# EAGLE board Trafo_schematics (EAGLE 9.6.2)
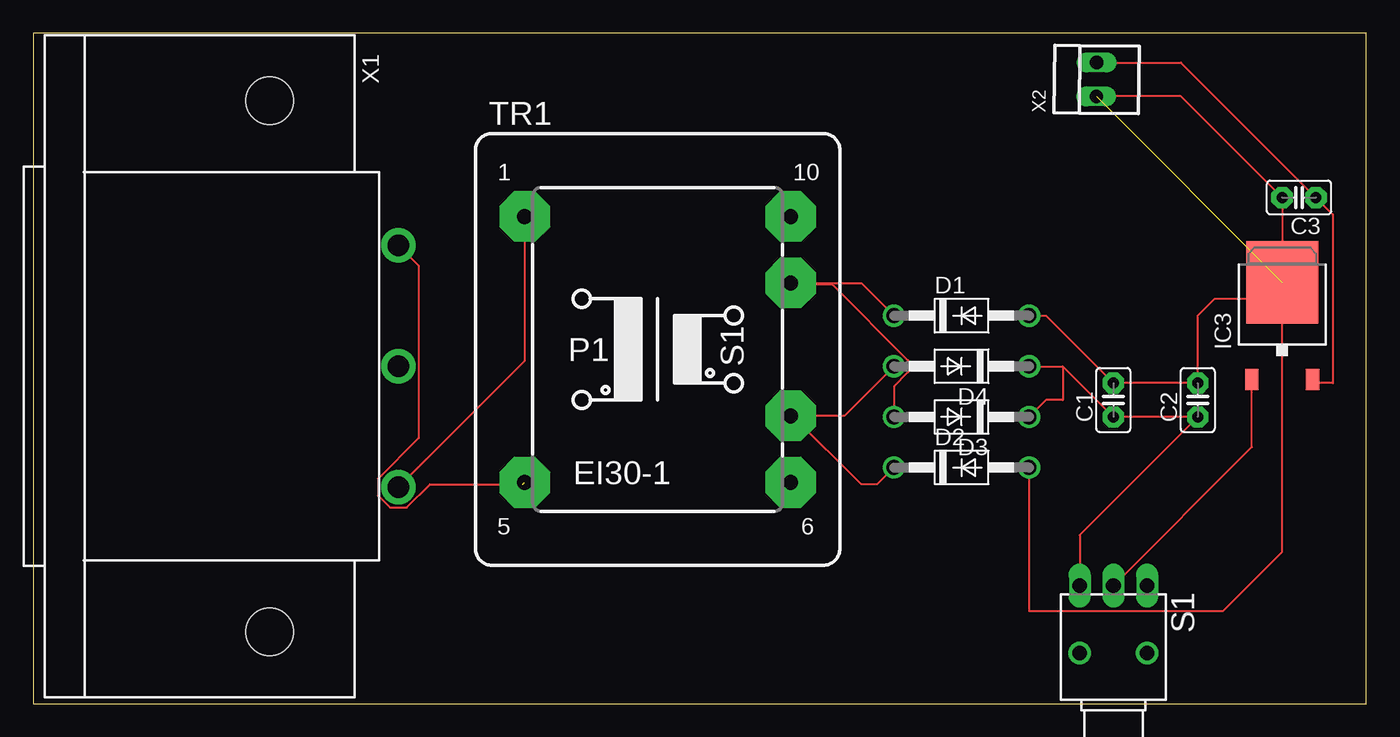
[diagram p0: board, top side]

Size 100.31 x 50.47 mm. Coordinates in mm from the lower left corner, seen from the top.
Outline: 0,0 100.31,0 100.31,50.47 0,50.47 0,0
Copper layers (1*16): Top 0.035mm / dielectric 1.5mm / Bottom 0.035mm
Design rules "default": minimum track width 6mil, minimum drill 0.35mm, track to track 6mil, track to pad 6mil, pad to pad 6mil, via to via 6mil, smd to smd 6mil, copper to edge 40mil, drill to drill 6mil, minimum pad ring 10mil, minimum via ring 8mil, stop-mask expansion 4mil, vias tented up to drill 0mil, thermal gap 10mil

## Footprints (pad centres in the part's own frame; a part is rotated, then mirrored left to right if it is on the bottom)
C2.5-2 = drill 0.813 pad 1.6 octagon: 1 -1.27,0; 2 1.27,0
DO41-10 = drill 1.118: A 5.08,0; C -5.08,0
TO252 = smd 1 x 1.6: 1 -2.28,-4.8; 2 2.28,-4.8 | smd 5.4 x 6.2: 3 0,2.5
TL3XWO = drill 1.1 pad 1.422 long: 1 -2.54,-5.08; 2 0,-5.08; 3 2.54,-5.08 | drill 1.1 pad 1.676: M1 -2.54,0; M2 2.54,0
EI30-1 = drill 1.118 pad 3.81 octagon: 1 -10.008,10.008; 5 -10.008,-10.008; 6 10.008,-10.008; 7 10.008,-5.004; 9 10.008,5.004; 10 10.008,10.008
6ESRM-P = drill 1.6 pad 2.6: 1 -9.1,9.7; 2 0,9.7; 3 9.1,9.7 | hole 3.6: -20,0; 20,0
22-23-2021 = drill 1 long: 1 -1.27,0; 2 1.27,0

## Placement (x,y rotation side)
C1  10uF  [C2.5-2]  81.28,22.86 90 top
C2  10uF  [C2.5-2]  87.63,22.86 90 top
C3  10uF  [C2.5-2]  95.25,38.1 180 top
D1  1N4004  [DO41-10]  69.85,29.21 0 top
D2  1N4004  [DO41-10]  69.85,17.78 0 top
D3  1N4004  [DO41-10]  69.85,21.59 180 top
D4  1N4004  [DO41-10]  69.85,25.4 180 top
IC3  7805DT  [TO252]  93.98,29.21 0 top
S1  TL32WO  [TL3XWO]  81.28,3.81 180 top
TR1  [EI30-1]  46.99,26.67 0 top
X1  6ESRM-P  [6ESRM-P]  17.78,25.4 270 top
X2  22-23-2021  [22-23-2021]  80.01,46.99 89.3 top

## Library data of the parts
C1-C3 = capacitor-wima
D1-D4 = diode
IC3 = linear
S1 = switch
TR1 = trafo
X1 = con-tycoelectronics; MF: TYCO ELECTRONICS; MPN: 6ESRM-P; OC_FARNELL: unknown; OC_NEWARK: 87F1821
X2 = con-molex; MF: MOLEX; MPN: 22-23-2021; OC_FARNELL: 1462926; OC_NEWARK: 25C3832

## Nets
+5V: C3.1 IC3.2 X2.2
GND: C1.2 C2.2 C3.2 D1.A D2.A IC3.3 X2.1
N$47: D1.C D3.A TR1.9
N$48: D2.C D4.A TR1.7
N$49: TR1.1 X1.3
N$50: TR1.5 X1.1
N$52: C1.1 C2.1 D3.C D4.C S1.3
N$59: IC3.1 S1.2

## Tracks (layer width: path | path; a pad name or v marks a point on that pad's centre or on a via)
+5V
  Top 0.152: IC3.2 96.54,24.13 97.79,24.13 97.79,36.83 C3.1 86.36,48.26 X2.2
GND  (1 unrouted)
  Top 0.152: 93.98,30.48 88.9,30.48 87.63,29.21 C2.2 C1.2 76.2,29.21 D1.A | D2.A 74.93,6.96 89.51,6.96 93.98,11.43 93.98,30.48 | 93.98,30.48 C3.2 86.36,45.72 X2.1
N$47
  Top 0.152: TR1.9 57.04,31.64 | 57.04,31.64 57.12,31.55 60.13,31.55 65.84,25.84 65.84,24.96 64.77,23.89 D3.A | D1.C 62.34,31.64 57.04,31.64
N$48
  Top 0.152: TR1.7 57.15,21.67 | D4.A 61.04,21.67 57.15,21.67 | D2.C 63.5,16.51 62.31,16.51 57.15,21.67
N$49
  Top 0.152: TR1.1 36.98,25.8 X1.3
N$50  (1 unrouted)
  Top 0.152: X1.1 29.01,32.97 29.01,19.99 25.95,16.93 25.95,15.67 26.85,14.77 28.11,14.77 29.85,16.51 36.83,16.51
N$52
  Top 0.152: S1.3 78.74,12.7 C2.1 C1.1 77.47,25.4 | D4.C 77.47,25.4 | D3.C 76.2,22.86 77.47,22.86 77.47,25.4
N$59
  Top 0.152: S1.2 91.7,19.31 IC3.1